# Altium PCB PCB1.PcbDoc
Units mm, origin at the board's own origin, x right, y up, seen from the top; angles counter-clockwise.
Board outline 64 x 100 mm, 2 copper layers (Top Layer, Bottom Layer); 37 components, 46 nets, 202 pads, 46 vias.
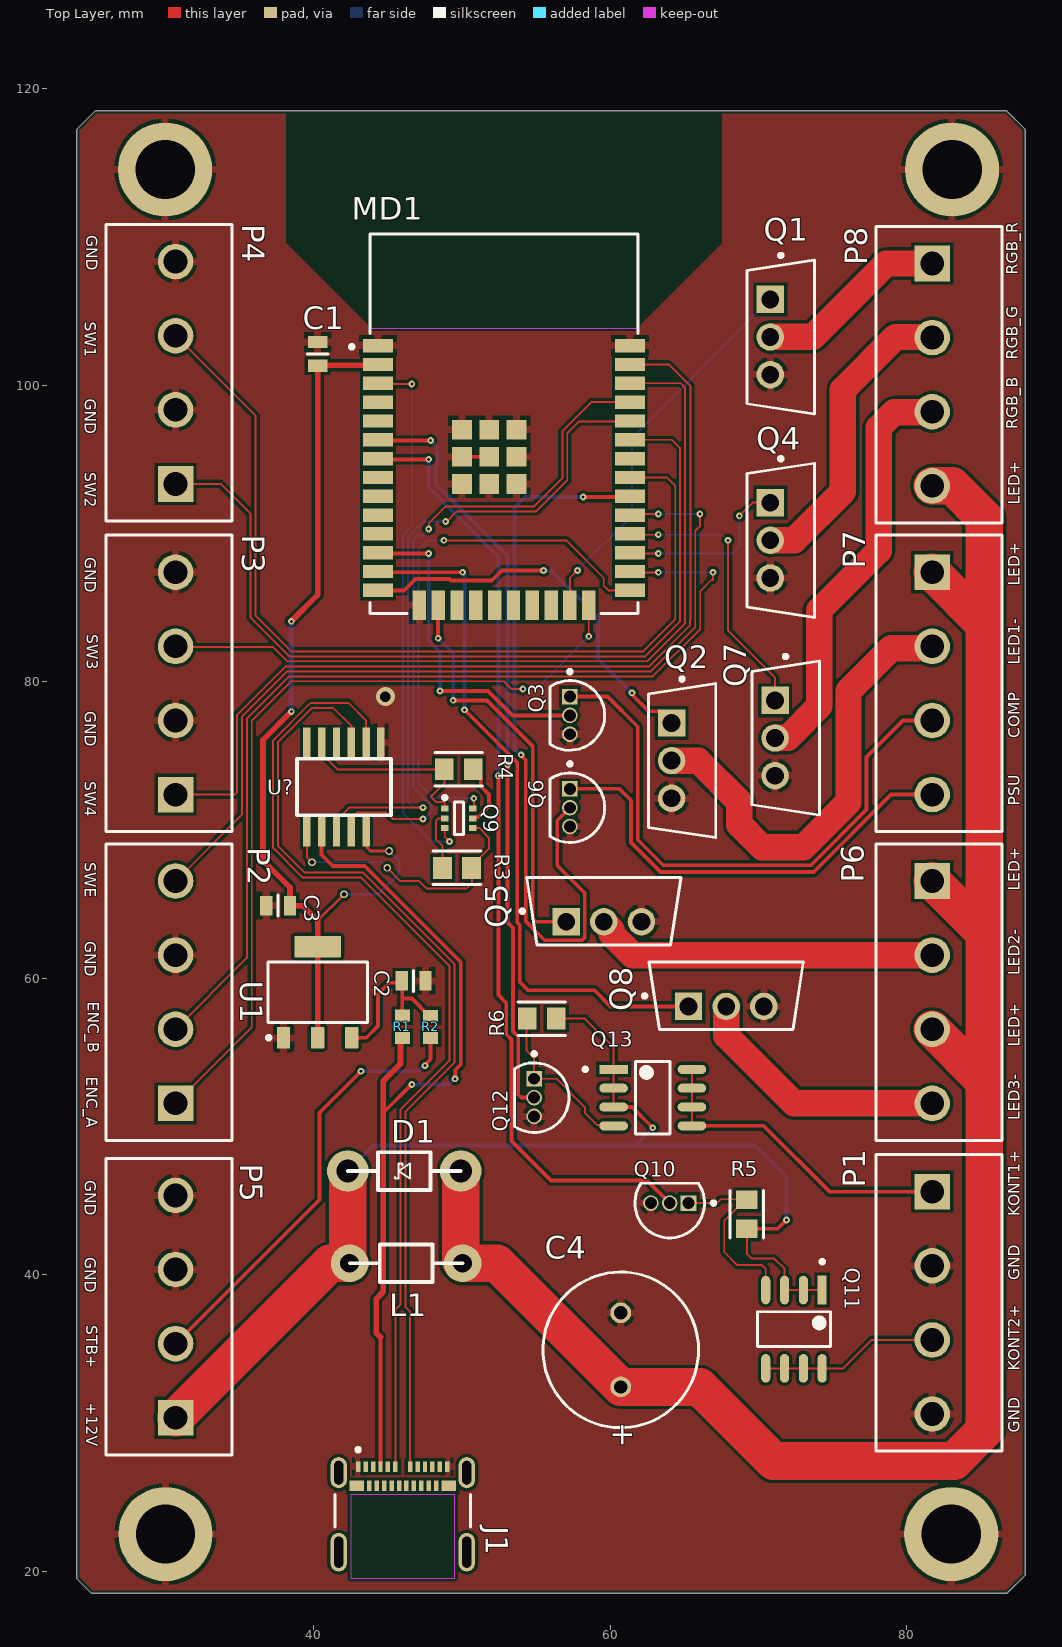
[diagram p0: Top Layer view]
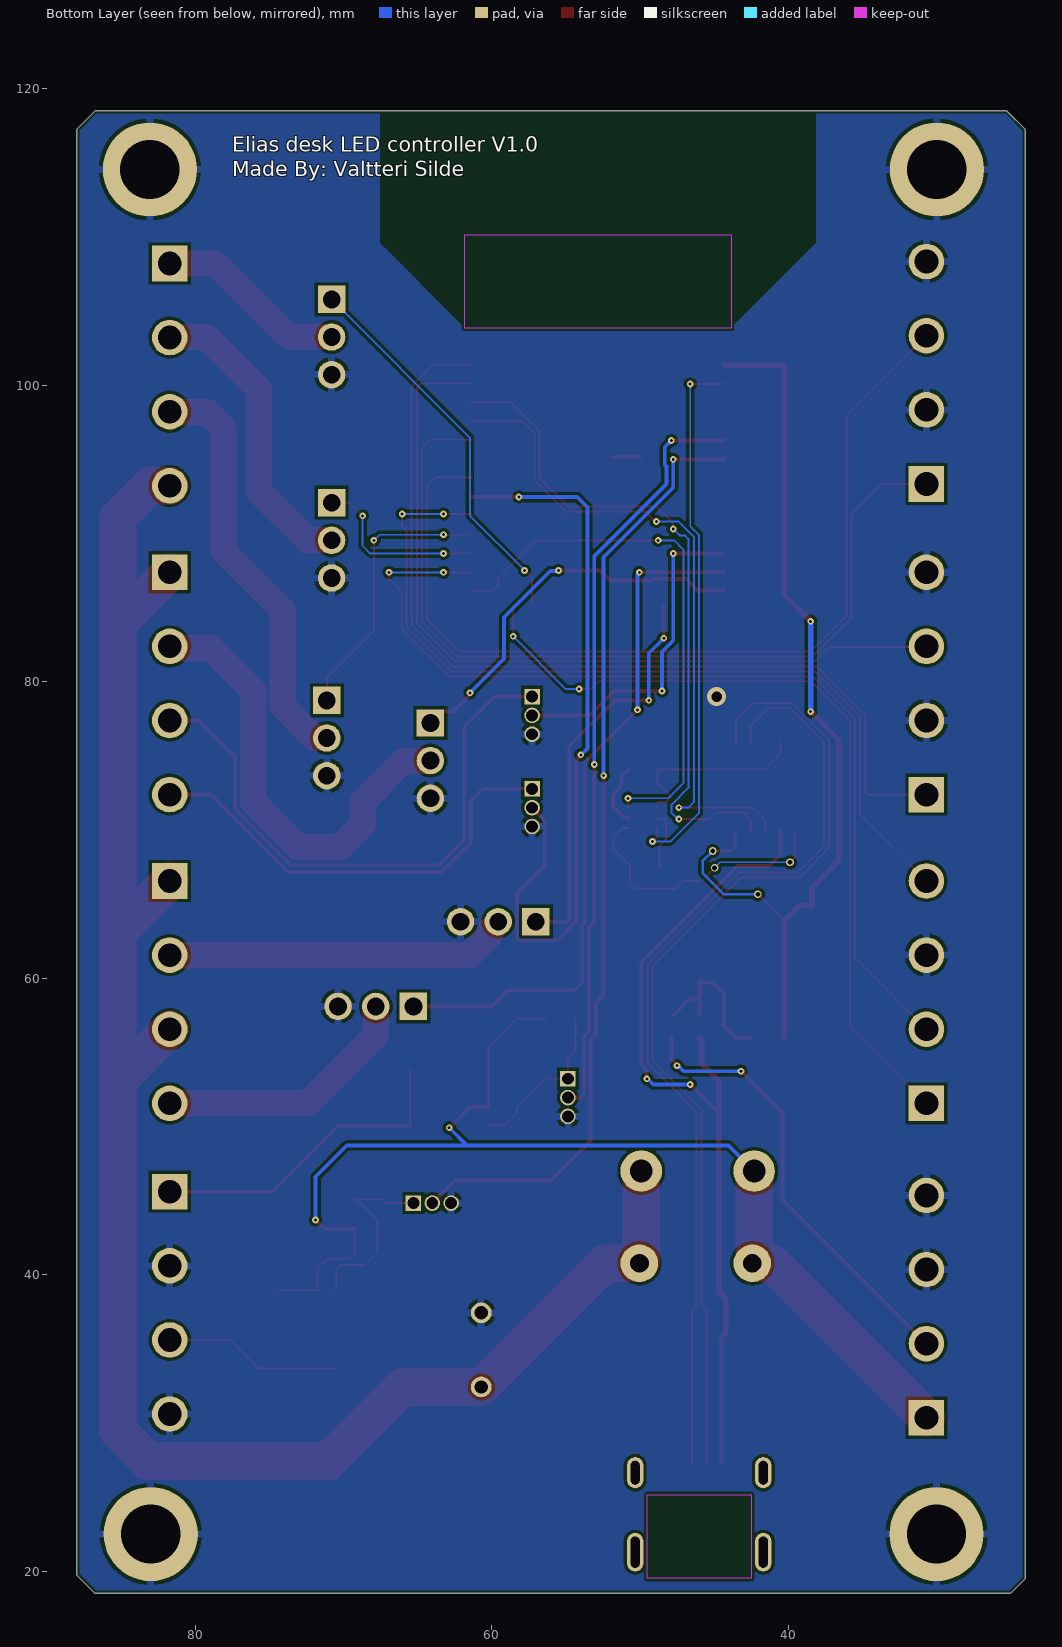
[diagram p1: Bottom Layer view, seen from below]
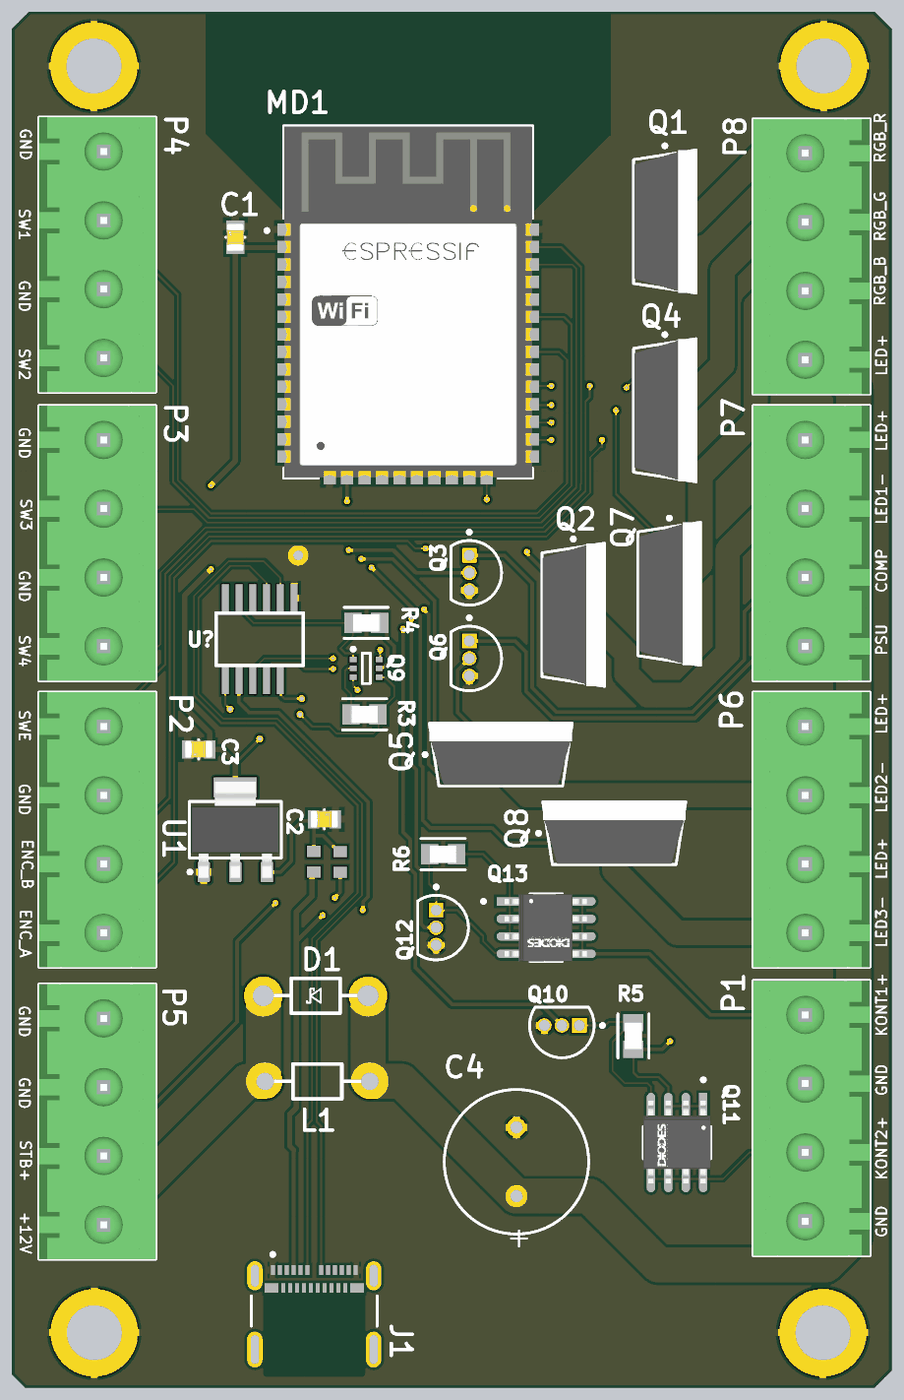
[diagram p2: 3D render of the assembled board from above, using the file's embedded part models]

## Layer stack, top to bottom
Top Solder: solder mask 0.0102, Solder Resist, Dk 3.5
Top Layer: signal copper 0.0356
Dielectric 1: dielectric 0.32, FR-4, Dk 4.8
Bottom Layer: signal copper 0.0356
Bottom Solder: solder mask 0.0102, Solder Resist, Dk 3.5

## Board outline
25.25,118.5 24,117.25 24,19.5 25,18.5 86.75,18.5 88,19.75 88,117.25 86.75,118.5

## Design rules (kind name [scope] priority, off if disabled: settings)
BoardOutlineClearance [All] p1: gap=0.2 ignorepadtopadclearanceinfootprint=FALSE except(0.4: Arc-SplitBarrior Arc-SplitContinuation Track-SplitBarrior Track-SplitContinuation SMDPad-SplitBarrior SMDPad-SplitContinuation THPad-SplitBarrior THPad-SplitContinuation Via-SplitBarrior Via-SplitContinuation Fill-SplitBarrior Fill-SplitContinuation Poly-SplitBarrior Poly-SplitContinuation Region-SplitBarrior Region-SplitContinuation Text-SplitBarrior Text-SplitContinuation)
Clearance "Clearance Bottom Layer" [OnLayer('Bottom Layer')] p1: gap=0.203 ignorepadtopadclearanceinfootprint=TRUE except(0.254: Arc-Text Track-Text SMDPad-Text THPad-Text Via-Text Fill-Text Poly-Text Region-Text Text-Text)
Clearance "Clearance Top Layer" [OnLayer('Top Layer')] p2: gap=0.203 ignorepadtopadclearanceinfootprint=TRUE except(0.254: Arc-Text Track-Text SMDPad-Text THPad-Text Via-Text Fill-Text Poly-Text Region-Text Text-Text)
Clearance [All] p3: gap=0.2 ignorepadtopadclearanceinfootprint=FALSE except(0.089: Arc-Arc Arc-Track Arc-SMDPad Track-Track Track-SMDPad SMDPad-SMDPad; 0.127: Arc-Via Track-Via SMDPad-Via THPad-Via Via-Via; 0.254: Arc-Text Track-Text SMDPad-Text THPad-Text Via-Text Fill-Text Poly-Text Region-Text Text-Text)
HoleSize [All] p1: absolutevalues=TRUE maxlimit=6.3 minlimit=0.2 maxpercent=80.000 minpercent=20.000
MinimumAnnularRing [All] p1: minimumring=0.076
MinimumSolderMaskSliver [All] p1: minsoldermaskwidth=0.1
PolygonConnect PolygonConnect_1 [All] p1: thpad.connectstyle=Relief thpad.reliefconductorwidth=0.508 thpad.reliefentries=4 thpad.polygonreliefangle="90 Angle" thpad.airgapwidth=0.254 smdpad.connectstyle=Relief smdpad.reliefconductorwidth=0.508 smdpad.reliefentries=4 smdpad.polygonreliefangle="90 Angle" smdpad.airgapwidth=0.254 via.connectstyle=Direct via.reliefconductorwidth=0.508 via.reliefentries=4 via.polygonreliefangle="90 Angle" via.airgapwidth=0.254
RoomDefinition Sheet1 [InComponentClass('Sheet1')] p1: confinementstyle=ConfineIn formatcopy=TRUE lockcomponents=FALSE outline 104.521,66.294 121.539,66.294 121.539,77.216 104.521,77.216
RoutingCorners [All] p1: cornerstyle=Round minsetback=2.54 maxsetback=2.54
RoutingVias [All] p1: holewidth=0.5 width=1 viastyle="Through Hole" minholewidth=0.2 minwidth=0.45 maxholewidth=1 maxwidth=2
SilkToSilkClearance [All] p1: silktosilkclearance=0.1
SilkToSolderMaskClearance [IsPad] p1: minsilkscreentomaskgap=0.1 clearancetoexposedcopper=TRUE
SolderMaskExpansion [All] p1: expansion=0.102 istentingtop=FALSE
Width [All] p1: maxlimit=2.54 minlimit=0.089 preferedwidth=0.381
25 further rules are at their usual default settings.

## Components (designator, comment, footprint, x,y, rotation, side; value= is the part's Value field where it differs from the comment)
C1 "CL21B106KOQNNNG" FP-CL21B106KOQNNNG-MFG 40.259,102.108 r90 top value=10uF
C2 "CL21B106KOQNNNG" FP-CL21B106KOQNNNG-MFG 46.736,59.817 r0 top value=10uF
C3 "CL21B106KOQNNNG" FP-CL21B106KOQNNNG-MFG 37.592,64.897 r180 top value=22uF
C4 "ECA-1HHG471" PNSC-CAP-10x20-P2 60.706,34.925 r90 top
D1 "15SQ045" "Shottky Diode" 46.101,46.99 r180 top
J1 "1054500101" FP-1054500101-MFG 46,23.28 r0 top
L1 "77 A-3 R 9 M-00" "FIlter Inductor" 46.228,40.767 r0 top
MD1 "ESP32-WROOM-32D" FP-ESP32-WROOM-32D-MFG 52.832,97.409 r0 top
P1 "691311700004" 691311700004 82.169,38.1 r270 top
P2 "691311700004" 691311700004 30.226,59.055 r90 top
P3 "691311700004" 691311700004 30.226,79.883 r90 top
P4 "691311700004" 691311700004 30.226,100.838 r90 top
P5 "691311700004" 691311700004 30.226,37.846 r90 top
P6 "691311700004" 691311700004 82.169,59.055 r270 top
P7 "691311700004" 691311700004 82.169,79.883 r270 top
P8 "691311700004" 691311700004 82.169,100.711 r270 top
Q1 "IRLZ44NPbF" FP-PG-TO220-3-MFG 71.501,103.251 r0 top
Q2 "IRLZ44NPbF" FP-PG-TO220-3-MFG 64.84,74.676 r0 top
Q3 "BS170" ONSC-TO-92-3-29-11 57.277,77.724 r270 top
Q4 "IRLZ44NPbF" FP-PG-TO220-3-MFG 71.501,89.535 r0 top
Q5 "IRLZ44NPbF" FP-PG-TO220-3-MFG 59.563,64.516 r90 top
Q6 "BS170" ONSC-TO-92-3-29-11 57.277,71.501 r270 top
Q7 "IRLZ44NPbF" FP-PG-TO220-3-MFG 71.825,76.2 r0 top
Q8 "IRLZ44NPbF" FP-PG-TO220-3-MFG 67.818,58.801 r90 top
Q9 "BC846BDW1T1G" ONSC-SOT-363-6-419B-02_W_V 49.784,70.782 r0 top
Q10 "BS170" ONSC-TO-92-3-29-11 64.008,44.831 r180 top
Q11 "EY4409" FP-SO-8-IPC_A 72.39,36.322 r270 top
Q12 "BS170" ONSC-TO-92-3-29-11 54.864,51.943 r270 top
Q13 "EY4409" FP-SO-8-IPC_A 62.865,51.943 r0 top
R1 "RC0603JR-070RL" RESC1608X55X25ML10T15 45.974,56.726 r90 top
R2 "RC0603JR-070RL" RESC1608X55X25ML10T15 47.879,56.714 r90 top
R3 "CR0805-FX-1002ELF" FP-CR0805-IPC_A 49.657,67.437 r180 top
R4 "CR0805-FX-1002ELF" FP-CR0805-IPC_A 49.784,74.084 r180 top
R5 "CR0805-FX-1002ELF" FP-CR0805-IPC_A 69.215,44.069 r270 top
R6 "CR0805-FX-1002ELF" FP-CR0805-IPC_A 55.372,57.277 r0 top
U1 "CJT1117B-3.3" DCY0004A_L 40.259,59.055 r90 top
U? "CH340K USB to UART bridge IC" "CH340K footprint" 41.529,72.898 r270 top

## Footprints (in the part's own frame and the unit in brackets; to place one, negate y for a bottom-side part, rotate by r counter-clockwise, add the part's x,y. Pads: shape width x height; smd on the part's side, far side on the other; paste and mask are expansions set on the pad)
691311700004 [mm] "5.00mm - Open Vertical PCB Header - 04p"
  rect 2.4x2.4 hole 1.6: 1(-7.5,-0.45)
  round 2.4 hole 1.6: 2(-2.5,-0.45) 3(2.5,-0.45) 4(7.5,-0.45)
  silkscreen extent -10,-4.25 10,4.25, body extent -10,-4.25 10,4.25, height 12.1
"CH340K footprint" [mm]
  rect 2x0.5 smd: 0(-3,3) 1(-3,2) 2(-3,1) 3(-3,0) 4(-3,-1) 5(-3,-2) 6(3,-2) 7(3,-1) 8(3,0) 9(3,1) 10(3,2)
  silkscreen extent -1.91,-2.67 1.91,3.68
DCY0004A_L [mm] "SOT223, 4-Leads, Body 6.7x3.7mm, Pitch 2.3mm, IPC High Density"
  rrect11% 1.45x0.9 smd: 1(-3.075,2.3) 2(-3.075,0) 3(-3.075,-2.3)
  rrect7% 1.45x3.15 smd: 4(3.075,0)
  silkscreen extent -3.2,-3.35 2.05,3.42, body extent -3.5,-3.25 3.5,3.25, height 1.62
"FIlter Inductor" [mm] "Fastron  77 A-3 R 9 M-00"
  round 2.54 hole 1.27: 1(-3.81,0) 2(3.81,0)
  silkscreen extent -3.81,-1.27 3.81,1.27
FP-1054500101-MFG [mm]
  rrect100% 1.1x2.1 hole 1.6 slot 0.6 at 0 deg paste-1000 mask+0: 1(-4.32,3.36) 2(4.32,3.36)
  rrect100% 1.1x2.6 hole 2.1 slot 0.6 at 0 deg paste-1000 mask+0: 3(-4.32,-2) 4(4.32,-2)
  rect 0.3x0.7 smd paste+0 mask+0: A1(-3,3.77) A2(-2.5,3.77) A3(-2,3.77) A4(-1.5,3.77) A5(-1,3.77) A6(-0.5,3.77) A7(0.5,3.77) A8(1,3.77) A9(1.5,3.77) A10(2,3.77) A11(2.5,3.77) A12(3,3.77) B2(2.25,2.47) B3(1.75,2.47) B4(1.25,2.47) B5(0.75,2.47) B6(0.25,2.47) B7(-0.25,2.47) B8(-0.75,2.47) B9(-1.25,2.47) B10(-1.75,2.47) B11(-2.25,2.47)
  rect 1x0.7 smd paste+0 mask+0: B1(3.1,2.47) B12(-3.1,2.47)
  Keep-Out Layer region: -3.5,-3.77 3.5,-3.77 3.5,1.88 -3.5,1.88
  silkscreen extent -4.57,-0.3 4.57,5.03
FP-CL21B106KOQNNNG-MFG [mm]
  rect 0.825x1.325 smd paste+0 mask+0: 1(-0.8,0) 2(0.8,0)
  silkscreen extent 0,-0.7 0,0.7, body extent -1.31,-0.8 1.31,0.8, height 0.25
FP-CR0805-IPC_A [mm]
  rect 1.258x1.462 smd paste+0 mask+0: 1(-0.977,0) 2(0.977,0)
  silkscreen extent -1.61,-1.13 1.61,1.13, body extent -2.11,-1.23 2.11,1.23, height 0.25
FP-ESP32-WROOM-32D-MFG [mm]
  rect 2x0.9 smd paste+0 mask+0: 1(-8.5,5.26) 2(-8.5,3.99) 3(-8.5,2.72) 4(-8.5,1.45) 5(-8.5,0.18) 6(-8.5,-1.09) 7(-8.5,-2.36) 8(-8.5,-3.63) 9(-8.5,-4.9) 10(-8.5,-6.17) 11(-8.5,-7.44) 12(-8.5,-8.71) 13(-8.5,-9.98) 14(-8.5,-11.25) 25(8.5,-11.25) 26(8.5,-9.98) 27(8.5,-8.71) 28(8.5,-7.44) 29(8.5,-6.17) 30(8.5,-4.9) 31(8.5,-3.63) 32(8.5,-2.36) 33(8.5,-1.09) 34(8.5,0.18) 35(8.5,1.45) 36(8.5,2.72) 37(8.5,3.99) 38(8.5,5.26)
  rect 0.9x2 smd paste+0 mask+0: 15(-5.715,-12.25) 16(-4.445,-12.25) 17(-3.175,-12.25) 18(-1.905,-12.25) 19(-0.635,-12.25) 20(0.635,-12.25) 21(1.905,-12.25) 22(3.175,-12.25) 23(4.445,-12.25) 24(5.715,-12.25)
  rect 1.33x1.33 smd paste+0 mask+0: 39(-2.835,-4.075) 39(-2.835,-2.24) 39(-2.835,-0.405) 39(-1,-4.075) 39(-1,-2.24) 39(-1,-0.405) 39(0.835,-4.075) 39(0.835,-2.24) 39(0.835,-0.405)
  Keep-Out Layer region: -9,6.45 9,6.45 9,12.75 -9,12.75
  Keep-Out Layer region: -9,6.45 9,6.45 9,12.75 -9,12.75
  silkscreen extent -10.4,-12.8 9.05,12.8, body extent -9.6,-13.35 9.6,12.9, height 0.25
FP-PG-TO220-3-MFG [mm]
  rect 1.85x1.85 hole 1.2 paste-1000 mask+0: 1(-0.705,2.54)
  round 1.85 hole 1.2 paste-1000 mask+0: 2(-0.705,0) 3(-0.705,-2.54)
  silkscreen extent -2.27,-5.2 2.27,5.62, body extent -2.37,-5.55 2.37,5.55, height 0.25
FP-SO-8-IPC_A [mm]
  rect 1.93x0.612 smd paste+0 mask+0: 1(-2.641,1.905)
  rrect100% 1.93x0.612 smd paste+0 mask+0: 2(-2.641,0.635) 3(-2.641,-0.635) 4(-2.641,-1.905) 5(2.641,-1.905) 6(2.641,-0.635) 7(2.641,0.635) 8(2.641,1.905)
  silkscreen extent -4.68,-2.45 1.18,2.45, body extent -4.11,-2.95 4.11,2.95, height 0.25
ONSC-SOT-363-6-419B-02_W_V [mm] "SOT23, 6-Leads, Body 2x1.25mm, Pitch 0.65mm"
  rect 0.5x0.4 smd: 1(-0.95,0.65) 2(-0.95,0) 3(-0.95,-0.65) 4(0.95,-0.65) 5(0.95,0) 6(0.95,0.65)
  silkscreen extent -1.07,-1.1 0.3,1.52, body extent -0.63,-1 0.63,1, height 1.1
ONSC-TO-92-3-29-11 [mm] "TO, 3-Leads, Body Dia 4.7mm, Pitch 1.27mm"
  rect 1.05x1.05 hole 0.8: 1(-1.27,0)
  round 1.05 hole 0.8: 2(0,0) 3(1.27,0)
  silkscreen extent -3.07,-1.34 2.35,2.35, body extent -2.35,-1.33 2.36,2.36, height 7.87
PNSC-CAP-10x20-P2 [mm] "THD, 2-Leads, Dia 10.5mm, Body Length 22mm, Pin Spacing 5mm"
  round 1.4 hole 0.9: 1(-2.5,0) 2(2.5,0)
  silkscreen extent -5.25,-5.25 5.25,5.25, body extent -5.25,-5.25 5.25,5.25, height 22
RESC1608X55X25ML10T15 [mm] "Chip Resistor, 2-Leads, Body 1.60x0.80mm, IPC Low Density"
  rect 0.8x1 smd: 1(-0.75,0) 2(0.75,0)
  body extent -0.85,-0.45 0.85,0.45, height 0.55
"Shottky Diode" [mil] "Diotec 15SQ045"
  round 110 hole 60: 1(-150,0) 2(150,0)
  silkscreen extent -150,-50 150,50

## Part data
C1: library part CMP-13271-000015-1, "CAP CER 10UF 16V X7R 0805", Capacitance=100nF, Manufacturer="Samsung Electro-Mechanics", Package=0, Temperature="-55°C to +125°C", Temperature Characteristic=X7R, Temperature Coefficient=15%, Temperature Range High=+125°C, Temperature Range Low=-55°C, Tolerance=10%, Voltage Rating=16V, Automotive=No, Category=Cap, ComponentLink2Description=Datasheet, ComponentLink2URL=http://product.samsungsem.com/mlcc/CL21B106KOQNNN.do, Device Class L1="Passive Components", Device Class L2=Capacitors, Device Class L3="Ceramic Capacitors", Digikey Description="CAP CER 10UF 16V X7R 0805", Height=1.4mm, Ipc Land Pattern Name=CAPC200125X125, Lead Free=Yes, Manufacturer Part Number=CL21B106KOQNNNG, Material=Ceramic, Octopart=https://octopart.com/cl21b106koqnnng-samsung-19995691, RoHS=TRUE
C2: library part CMP-13271-000015-1, "CAP CER 10UF 16V X7R 0805", Capacitance=10uF, Manufacturer="Samsung Electro-Mechanics", Package=0, Temperature="-55°C to +125°C", Temperature Characteristic=X7R, Temperature Coefficient=15%, Temperature Range High=+125°C, Temperature Range Low=-55°C, Tolerance=10%, Voltage Rating=16V, Automotive=No, Category=Cap, ComponentLink2Description=Datasheet, ComponentLink2URL=http://product.samsungsem.com/mlcc/CL21B106KOQNNN.do, Device Class L1="Passive Components", Device Class L2=Capacitors, Device Class L3="Ceramic Capacitors", Digikey Description="CAP CER 10UF 16V X7R 0805", Height=1.4mm, Ipc Land Pattern Name=CAPC200125X125, Lead Free=Yes, Manufacturer Part Number=CL21B106KOQNNNG, Material=Ceramic, Octopart=https://octopart.com/cl21b106koqnnng-samsung-19995691, RoHS=TRUE
C3: library part CMP-13271-000015-1, "CAP CER 10UF 16V X7R 0805", Capacitance=22uF, Manufacturer="Samsung Electro-Mechanics", Package=0, Temperature="-55°C to +125°C", Temperature Characteristic=X7R, Temperature Coefficient=15%, Temperature Range High=+125°C, Temperature Range Low=-55°C, Tolerance=10%, Voltage Rating=16V, Automotive=No, Category=Cap, ComponentLink2Description=Datasheet, ComponentLink2URL=http://product.samsungsem.com/mlcc/CL21B106KOQNNN.do, Device Class L1="Passive Components", Device Class L2=Capacitors, Device Class L3="Ceramic Capacitors", Digikey Description="CAP CER 10UF 16V X7R 0805", Height=1.4mm, Ipc Land Pattern Name=CAPC200125X125, Lead Free=Yes, Manufacturer Part Number=CL21B106KOQNNNG, Material=Ceramic, Octopart=https://octopart.com/cl21b106koqnnng-samsung-19995691, RoHS=TRUE
C4: library part CMP-2000-05308-1, "Aluminum Electrolytic Capacitor, 470 uF, +/- 20%, 50 V, -55 to 105 degC, 2-Pin THD, RoHS, Bulk", Capacitance=470µF, Case Size/Dimension=Ø10x20mm, Lifetime@Temperature=2000Hrs@105degC, Manufacturer=Panasonic, Operating Temp Range=-55to+105degC, Operating Temp-Max=105degC, Package Description="2-Pin Through Hole Device, Dia 10 mm, Body Length 20 mm, Pin Spacing 5 mm", Package Reference=CAP-10x20-P2, Package Version=Nov-12, Rated Voltage=50V, Ripple Current=530mA, Datasheet URL=http://www.alliedelec.com/images/products/datasheets/bm/Panasonic/70067776.pdf, Datasheet Version=Nov-12, Manufacturer URL=http://www.panasonic.com/, Package URL=http://www.alliedelec.com/images/products/datasheets/bm/Panasonic/70067776.pdf, Series=NHG, Type=Radial
D1: "Diotec 15SQ045", Current=15A, Voltage=45V
J1: library part CMP-04767-000004-1, "CONN RCP USB3.1 TYPEC 24P SMD RA", Current Rating=0.25/1.25/5A, Manufacturer=Molex, Package=0, Temperature="-30°C to +85°C", Temperature Range High=+85°C, Temperature Range Low=-30°C, Voltage Rating=30V, Automotive=No, Category=Conn, ComponentLink2Description=Datasheet, ComponentLink2URL=https://www.molex.com/webdocs/datasheets/pdf/en-us/1054500101_IO_CONNECTORS.pdf, Conn Orientation="Right Angle", Contact Material=Gold,Nickel, Device Class L1=Connectors, Device Class L2="USB Connectors", Device Class L3=unset, Digikey Description="CONN RCP USB3.1 TYPEC 24P SMD RA", Footprint Url=https://www.molex.com/pdm_docs/sd/1054500101_sd.pdf, Height=3.44mm, Is Female=yes, Lead Free=Yes, Manufacturer Part Number=1054500101, Mouser Description="USB Shielded I/O Receptacle; Type C; Right Angle; Surface Mount; Gold over Nickel", Number Of Contacts=24, Octopart=https://octopart.com/105450-0101-molex-68082325, Pitch=0.5mm, RoHS=TRUE, Shielding=true, Usb Standard="USB 3.1"
L1: "Fastron 77 A-3 R 9 M-00", Inductance=3.9uH, Max Current=12A, Tolerance=+-20%
MD1: library part CMP-194065-000003-1, "WIFI MODULE 32MBITS SPI FLASH", Manufacturer="Espressif Systems", Max Frequency=2484MHz, Max Supply Voltage=3.6V, Min Supply Voltage=3V, Nominal Supply Current=500mA, Temperature="-40°C to +85°C", Temperature Range High=+85°C, Temperature Range Low=-40°C, Automotive=No, Bandwidth=72MHz, Category=UNK, ComponentLink2Description=Datasheet, ComponentLink2URL=https://www.espressif.com/sites/default/files/documentation/esp32-wroom-32d_esp32-wroom-32u_datasheet_en.pdf, Data Rate=150Mbits/s, Device Class L1="Integrated Circuits (ICs)", Device Class L2="RF Semiconductors and Devices", Device Class L3=Transceivers, Digikey Description="WIFI MODULE 32MBITS SPI FLASH", Height=3.2mm, Interface=I2C,SPI,UART,Ethernet,I2S,Other, Lead Free=Yes, Manufacturer Part Number=ESP32-WROOM-32D, Mouser Description="Wi-Fi/BT BLE Module ESP32-D0WD, SPI Flash, UART, P", Number Of Adc Channels=16, Number Of Gpio=32, Octopart=https://octopart.com/esp32-wroom-32d-espressif+systems-91040050, Package=ESP32-WROOM-32D, RoHS=TRUE, Sensitivity=-98dBm
P1 P2 P3 P4 P5 P6 P7 P8: library part CMP-1502-02028-1, "Serie 3117 - 5.00mm Open Vertical PCB Header WR-TBL, 4 pin, LCSC: DB128V-5.08-4P-GN-S", Manufacturer="Wurth Elektronik", Operating Temperature=-40to105degC, Datasheet URL=http://katalog.we-online.de/em/datasheet/6913117000xx.pdf, Gender=Male, Manufacturer URL=http://www.we-online.de, Mounting Technology=THT, Package Reference=691311700004, Packaging=Box, Part Number=691311700004, Pin Number=4, Pitch=5.00mm, Publisher=WurthElektronik
Q1 Q2 Q4 Q5 Q7 Q8: library part CMP-32901-000488-1, "MOSFET N-CH 55V 47A TO220AB", Case/Package=TO-220, Continuous Drain Current (ID)=47A, Drain to Source Breakdown Voltage=55V, Drain to Source Resistance=35mR, Gate to Source Voltage (Vgs)=16V, Input Capacitance=1.7nF, Max Operating Temperature=175°C, Max Power Dissipation=110W, Min Operating Temperature=-55°C, Threshold Voltage=2V, Drain to Source Voltage (Vdss)=55V, Element Configuration=Single, Halogen Free="Halogen Free", Height=0.6inch, Lead Free="Lead Free", Length=0.414inch, Max Dual Supply Voltage=55V, Mount="Through Hole", Number of Pins=3, Packaging=Rail/Tube, Power Dissipation=110W, Rds On Max=22mR, REACH SVHC="No SVHC", RoHS Compliant=Yes, Turn-Off Delay Time=26ns, Turn-On Delay Time=11ns, Width=0.185inch
Q3 Q6 Q10 Q12: library part CMP-1058-00929-1, "Small Signal MOSFET, 500 mA, 60 V, N-Channel, 3-Pin TO-92, Bulk Box", Manufacturer="On Semiconductor", Package Type=TO-92, Channel Polarity="N Channel", ComponentLink1Description="Manufacturer URL", ComponentLink1URL=http://www.onsemi.com/, ComponentLink2Description=Datasheet, ComponentLink2URL=http://www.onsemi.com/pub_link/Collateral/BS170-D.PDF, ComponentLink3Description="Package Specification", ComponentLink3URL=http://www.onsemi.cn/pub_link/Collateral/2N6426-D.PDF, Configuration=Single, DatasheetVersion="Rev. 6", ID Max (A)=0.5, Mounting Technology="Through Hole", PackageDescription="3-Pin Transistor Outline, Body 4.825 x 3.685 mm, Pitch 1.27 mm", PackageReference=TO-92-3-29-11_AM_SL, PackageVersion="Rev. AM", Packing="Bulk Box", PartNumber=BS170, PD Max (W)=0.35, V(BR)DSS Min (V)=60, VGS Max (V)=20, VGS(th) Max (V)=3
Q9: library part CMP-1048-00850-1, "Dual General Purpose Transistors, NPN, 6-Pin SOT-363, Pb-Free, Tape and Reel", Manufacturer="On Semiconductor", ComponentLink1Description="Manufacturer URL", ComponentLink1URL=http://www.onsemi.com/, ComponentLink2Description=Datasheet, ComponentLink2URL=http://www.onsemi.cn/pub_link/Collateral/BC846BDW1T1-D.PDF, ComponentLink3Description="Package Specification", ComponentLink3URL=http://www.onsemi.com/pub_link/Collateral/NTJD4001N-D.PDF, DatasheetVersion="Rev. 9", fT Min (MHz)=100, IC Continuous (A)=0.1, Mounting Technology="Surface Mount", PackageDescription="6-Pin Small Outline Transistor, Body 2 x 1.25 mm, Pitch 0.65 mm", PackageReference=SOT-363-6-419B-02_W, PackageVersion="Rev. W, 01/2006", Packing="Tape and Reel", PartNumber=BC846BDW1T1G, Polarity="Dual NPN", RoHS=TRUE
Q11 Q13: library part CMP-12801-000090-1, "MOSFET P-CH 30V 14A 8SOIC", Case/Package=SOP, Continuous Drain Current (ID)=10A, Drain to Source Resistance=8mR, Drain to Source Voltage (Vdss)=-20V, Gate to Source Voltage (Vgs)=12V, Input Capacitance=2.444nF, Max Operating Temperature=150°C, Max Power Dissipation=2.5W, Min Operating Temperature=-55°C, Package Quantity=2500, Threshold Voltage=770mV, Contact Plating=Tin, Element Configuration=Single, Fall Time=76.5ns, Height=1.5mm, Length=5.3mm, Mount="Surface Mount", Number of Channels=1, Number of Elements=1, Number of Pins=8, Packaging="Tape and Reel", Power Dissipation=2.5W, Radiation Hardening=No, Rds On Max=13mR, REACH SVHC="No SVHC", Rise Time=9.9ns, Turn-Off Delay Time=108ns, Turn-On Delay Time=7.5ns, Weight=0.030018oz, Width=4.1mm
R1 R2: library part CMP-2100-03667-1, "Chip Resistor, 0 Ohm, +/- 5%, 0.1 W, -55 to 155 degC, 0603 (1608 Metric), RoHS, Tape and Reel", Case Code (Imperial)=0603, Case Code (Metric)=1608, Manufacturer=Yageo, Max Operating Temperature=155degC, Min Operating Temperature=-55degC, Package Description="2-Pin Surface Mount Device, Body 1.6 x 0.8 mm", Package Quantity=5000, Power Rating=100mW, Resistance=0mOhm, Temperature Coefficient=200ppm/degreesC, Tolerance=5%, Voltage Rating=50V, Case/Package=0603, Composition=ThickFilm, Contact Plating=Tin, Datasheet URL=http://www.yageo.com/NewPortal/yageodocoutput?fileName=/pdf/R-Chip/PYu-RC_Group_51_RoHS_L_5.pdf, Datasheet Version="Rev. 5, 10/2016", Depth=0.8mm, Height=0.45mm, Lead Free=LeadFree, Length=1.6mm, Manufacturer URL=http://www.yageo.com/, Military Standard=Not, Number of Pins=2, Package Reference=0603, Packaging=TapeandReel, Radiation Hardening=No, REACH SVHC=NoSVHC, RoHSCompliant=true, Termination=SMD/SMT, Voltage Rating (DC)=50V, Width=0.8mm
R3 R4 R5 R6: library part CMP-07231-003204-1, "Thick Film Chip Resistors 0805 10kΩ 0.125W 1% 100ppm/°C", Case Code (Imperial)=0805, Case Code (Metric)=2012, Max Operating Temperature=155°C, Max Power Dissipation=125mW, Min Operating Temperature=-55°C, Package Quantity=1, Resistance=10kR, Temperature Coefficient=100ppm/°C, Tolerance=1%, Voltage Rating=150V, Voltage Rating (DC)=100V, Case/Package=0805, Composition="Thick Film", Contact Plating=Tin, Depth=1.25mm, Features="Moisture Resistant", Height=0.5mm, Length=2mm, Mount="Surface Mount", Number of Terminations=2, Packaging="Tape and Reel", Power Rating=125mW, Radiation Hardening=No, REACH SVHC="No SVHC", Termination=SMD/SMT, Thickness=508um, Width=1.25mm
U1: library part CMP-0395-00527-2, "75dB@(120Hz) 1A 1.3V@(1A) Fixed 3.3V~3.3V Positive 1 15V SOT-223 Linear Voltage Regulators (LDO) ROHS", Rating=Catalog, Code_JEDEC=TO-261, ComponentLink1Description="Manufacturer URL", ComponentLink1URL=http://www.ti.com/, ComponentLink2Description=Datasheet, ComponentLink2URL=https://datasheet.lcsc.com/lcsc/2108131530_Jiangsu-Changjing-Electronics-Technology-Co---Ltd--CJT1117B-3-3_C78777.pdf, ComponentLink3Description="Package Specification", ComponentLink3URL=http://www.ti.com/litv/pdf/mpds094a, DatasheetVersion=SBVS001D, Eco-Plan="Green (RoHS & no Sb/Br)", Fixed Output Options(V)=3.3, Iout(Max)(A)=0.8, Iq(Typ)(mA)=4, Mounting Technology="Surface Mount", PackageDescription="4-Pin Plastic Small Outline, Body 3.5 x 6.5 mm, Pitch 2.3 mm", PackageReference=DCY0004A, PackageVersion=4202506/B, PartNumber=CJT1117B-3.3, SubFamily="Single Channel LDO", Vdo(Typ)(mV)=1100, Vin(Max)(V)=15, Vin(Min)(V)=3.8, Vout Adj(Max)(V)=2.8, Vout Adj(Min)(V)=2.8
U?: library part CH340K

## Free pads (board coordinates)
  round 6.35 hole 4: 2(29.972,114.554) 3(83.058,114.554) 4(30,22.5) 5(83,22.5)

## Via types
v1: diameter 0.45, hole 0.2, Top Layer to Bottom Layer, 41 vias
v2: diameter 0.508, hole 0.33, Top Layer to Bottom Layer, 4 vias
v3: diameter 1.27, hole 0.711, Top Layer to Bottom Layer, 1 vias

## Nets (pads, with @x,y where several pads share a name; then routed paths per layer and width w, separated by ;. In a path a pad name is that pad's centre, name@x,y a point inside that pad or via, vN(x,y) a via of type N, cw(c..) or ccw(c..) an arc to the next point about the centre after c; other vN are vias at no path point)
+3V3: C1.1 C3.1 MD1.2 U1.2 U1.4 U?.10 | length 64.3
  Top Layer w0.178: 40.259,63.881 v2(42.037,65.659) ; U?.10 43.561,69.866 43.561,68.834 43.815,68.58 v2(45.085,68.58)
  Top Layer w0.381: v1(38.481,77.978) 36.576,76.073 36.576,67.945 38.392,66.129 C3.1 39.243,64.897 40.259,63.881 U1.4 U1.2 ; v1(38.481,84.074) 40.259,85.852 C1.1 40.304,101.353 44.286,101.353 MD1.2
  Bottom Layer w0.178: v2(42.037,65.659) 44.323,65.659 45.773,67.109 45.773,67.892 v2(45.085,68.58)
  Bottom Layer w0.381: v1(38.481,77.978) v1(38.481,84.074)
+12: D1.2 L1.1 P5.1 Q11.1 Q11.2 Q11.3 Q13.1 Q13.2 Q13.3 R5.2 R6.2 | length 81.6
  Top Layer w0.127: R6.2 58.293,57.277 60.224,55.346 Q13.1 Q13.2 Q13.3 ; R5.2 69.215,41.402 69.539,41.078 71.063,41.078 71.755,40.386 Q11.3 Q11.2 Q11.1
  Top Layer w0.254: Q13.3 61.468,51.308 v1(62.865,49.911) ; R5.2 71.286,43.092 v1(71.882,43.688)
  Top Layer w2.54: P5.1 41.097,40.767 L1.1 42.291,40.894 D1.2
  Bottom Layer w0.254: D1.2 44.018,48.717 61.671,48.717 ; v1(62.865,49.911) 61.671,48.717 ; v1(71.882,43.688) 71.882,46.609 69.774,48.717 61.671,48.717
Computer_Ctrl: MD1.12 Q3.2 | length 22.5
  Top Layer w0.254: MD1.12 44.385,88.646 v1(47.752,88.646) ; v1(48.514,79.375) 51.744,79.375 53.395,77.724 Q3.2
  Bottom Layer w0.254: v1(47.752,88.646) 47.752,82.781 48.514,82.019 v1(48.514,79.375)
Computer_On: P7.3 Q3.1 | length 39.7
  Top Layer w0.254: Q3.1 59.817,78.994 61.849,76.962 61.849,69.342 63.576,67.615 73.53,67.615 77.292,71.377 77.292,74.93 79.745,77.383 P7.3
DTR: Q9.1 R4.2 U?.4 | length 13.2
  Top Layer w0.127: U?.4 40.529,75.148 41.593,74.084 R4.2 48.807,73.143 47.903,72.239 48.26,71.882 48.76,71.882 48.834,71.808 Q9.1
EN: MD1.3 Q9.3 | length 36.4
  Top Layer w0.127: MD1.3 44.385,100.076 v1(46.609,100.076) ; Q9.3 48.834,69.53 v1(49.149,69.215)
  Bottom Layer w0.127: v1(46.609,100.076) 46.609,90.5 46.025,89.916 46.025,71.136 47.946,69.215 v1(49.149,69.215)
ENC_A: MD1.24 P2.1 | length 55.6
  Top Layer w0.127: P2.1 35.814,56.693 35.814,77.364 38.481,80.031 52.822,80.031 53.351,79.502 v1(54.098,79.502) ; v1(58.547,83.058) MD1.24
  Bottom Layer w0.127: v1(54.098,79.502) 54.991,79.502 v1(58.547,83.058)
ENC_B: MD1.26 P2.2 | length 65.9
  Top Layer w0.127: P2.2 35.484,61.363 35.484,77.5 38.344,80.361 62.879,80.361 66.065,83.547 66.065,86.106 66.827,86.868 66.929,86.868 v1(66.929,87.376) ; MD1.26 61.385,87.376 v1(63.246,87.376)
  Bottom Layer w0.127: v1(63.246,87.376) v1(66.929,87.376)
GND: C1.2 C2.2 C3.2 C4.2 J1.A1 J1.A12 MD1.1 MD1.15 MD1.38 MD1.39 P1.2 P1.4 P2.3 P3.2 P3.4 P4.2 P4.4 P5.3 P5.4 pad.2 pad.3 pad.4 pad.5 Q1.3 Q2.3 Q3.3 Q4.3 Q5.3 Q6.3 Q7.3 Q8.3 Q10.3 Q12.3 U1.1 U?.0 | length 1.8
  Top Layer w0.254: MD1.39@49.997,95.169 MD1.39@51.832,95.169
  other v3: 44.831,78.994
IO0: MD1.25 Q9.6 | length 36.9
  Top Layer w0.127: v1(48.768,89.535) 57.023,89.535 59.563,86.995 59.563,86.487 59.891,86.159 MD1.25 ; Q9.6 50.8,71.498 v1(50.8,72.136)
  Bottom Layer w0.127: v1(48.768,89.535) 47.701,89.535 47.066,88.9 47.066,73.152 48.082,72.136 v1(50.8,72.136)
Kont1+: P1.1 Q13.5 Q13.6 Q13.7 Q13.8 | length 21.9
  Top Layer w0.127: Q13.5 Q13.6 Q13.7 Q13.8
  Top Layer w0.254: Q13.5 70.358,50.038 74.796,45.6 P1.1
Kont1_ctrl: MD1.6 Q12.2 | length 51.4
  Top Layer w0.254: MD1.6 44.385,96.266 v1(47.879,96.266) ; v1(53.074,74.41) 53.074,63.763 53.436,63.402 53.436,56.409 53.797,56.048 53.797,52.143 53.997,51.943 Q12.2
  Bottom Layer w0.254: v1(47.879,96.266) 48.334,95.811 48.334,94.651 48.209,94.526 48.209,93.345 53.074,88.48 v1(53.074,74.41)
Kont2+: P1.3 Q11.5 Q11.6 Q11.7 Q11.8 | length 12
  Top Layer w0.127: Q11.5 Q11.6 Q11.7 Q11.8 75.718,33.681 77.637,35.6 P1.3
Kont2_ctrl: MD1.7 Q10.2 | length 64.1
  Top Layer w0.254: MD1.7 44.385,94.996 v1(47.752,94.996) ; v1(52.451,73.66) 52.451,58.862 52.979,58.334 52.979,56.22 53.34,55.858 53.34,49.022 56.007,46.355 62.484,46.355 Q10.2
  Bottom Layer w0.254: v1(47.752,94.996) 47.752,93.091 52.451,88.392 v1(52.451,73.66)
LED1-: P7.2 Q2.2 | length 30.9
  Top Layer w1.778: Q2.2 64.149,74.662 65.927,74.662 68.707,71.882 68.707,70.358 70.231,68.834 73.025,68.834 76.073,71.882 76.073,79.375 78.962,82.264 81.6,82.264 P7.2
LED1_CTRL: MD1.14 Q2.1 | length 26.4
  Top Layer w0.254: MD1.14 46.103,86.159 46.863,86.919 49.149,86.919 49.247,86.821 52.005,86.821 52.688,87.503 v1(55.499,87.503) ; v1(61.468,79.248) 61.468,79.121 62.575,78.014 63.337,78.014 Q2.1
  Bottom Layer w0.254: v1(55.499,87.503) 55.537,87.465 56.045,87.465 59.163,84.347 59.163,81.553 v1(61.468,79.248)
LED2-: P6.2 Q5.2 | length 23.3
  Top Layer w1.778: Q5.2 59.563,63.792 60.086,63.269 60.086,62.975 61.506,61.555 P6.2
LED2_CTRL: MD1.16 Q5.1 | length 27.5
  Top Layer w0.254: v1(48.387,82.931) MD1.16 ; v1(49.403,78.74) 51.689,78.74 54.762,75.667 54.762,64.015 54.966,63.811 Q5.1
  Bottom Layer w0.254: v1(48.387,82.931) 49.403,81.915 v1(49.403,78.74)
LED3-: P6.4 Q8.2 | length 17.8
  Top Layer w1.778: Q8.2 67.832,58.082 67.832,56.12 72.39,51.562 81.712,51.562 P6.4
LED3_CTRL: MD1.13 Q8.1 | length 47
  Top Layer w0.254: MD1.13 44.385,87.376 v1(50.038,87.376) ; v1(50.165,78.105) 53.721,74.549 53.721,63.763 53.893,63.591 53.893,59.743 54.454,59.182 58.928,59.182 60.014,58.096 Q8.1
  Bottom Layer w0.254: v1(50.038,87.376) 50.038,87.323 50.165,87.196 v1(50.165,78.105)
LED+: C4.1 D1.1 L1.2 P6.1 P6.3 P7.1 P8.4 | length 128.6
  Top Layer w2.54: D1.1 49.911,40.894 L1.2 52.364,40.767 C4.1 66.026,32.425 71.019,27.432 83.185,27.432 85.217,29.464 85.217,53.057 ; P6.3 85.217,53.057 ; P6.1 85.217,63.057 ; P7.1 85.217,83.885 ; P8.4 83.065,93.211 85.217,91.059 85.217,83.885 ; 85.217,53.057 85.217,63.057 ; 85.217,63.057 85.217,83.885
NetC2_1: C2.1 R1.2 R2.2 U1.3 | length 11
  Top Layer w0.254: U1.3 43.534,55.98 44.323,56.769 44.323,58.928 45.085,59.69 45.809,59.69 C2.1 45.974,59.779 45.974,58.627 ; R1.2 45.974,58.627 ; R2.2 47.779,57.464 46.615,58.627 45.974,58.627
NetQ9_2: Q9.2 R3.2 | length 4
  Top Layer w0.127: R3.2 48.68,68.922 48.244,69.358 48.244,70.632 48.393,70.782 Q9.2
NetQ9_5: Q9.5 R4.1 | length 4.3
  Top Layer w0.254: Q9.5 50.807,70.855 51.074,70.855 51.816,71.597 51.816,72.39 51.263,72.943 51.263,73.582 R4.1
NetQ10_1: Q10.1 Q11.4 R5.1 | length 13
  Top Layer w0.089: R5.1@69.176,45.085 R5.1
  Top Layer w0.127: Q10.1 67.183,44.831 67.437,45.085 R5.1@69.176,45.085 ; R5.1 69.113,45.046 67.691,43.624 67.691,41.529 68.58,40.64 70.231,40.64 70.485,40.386 Q11.4
NetQ12_1: Q12.1 Q13.4 R6.1 | length 11.2
  Top Layer w0.089: R6.1@54.356,57.238 R6.1 ; Q13.4@60.167,50.094 Q13.4
  Top Layer w0.127: R6.1@54.356,57.238 54.356,55.118 54.864,54.61 Q12.1 56.388,53.213 58.293,51.308 58.293,50.927 59.126,50.094 Q13.4@60.167,50.094
PSU_CTRL: MD1.30 Q6.2 | length 50.8
  Top Layer w0.254: v1(53.987,75.069) 53.987,75.016 54.305,74.697 54.305,63.826 55.575,62.556 58.085,62.556 58.278,62.749 58.278,65.739 56.422,67.595 56.422,70.646 Q6.2 ; v1(58.166,92.456) 61.279,92.456 MD1.30
  Bottom Layer w0.254: v1(53.987,75.069) 53.963,75.069 53.543,75.489 53.543,91.77 54.229,92.456 v1(58.166,92.456)
PSU_ON: P7.4 Q6.1 | length 30.6
  Top Layer w0.254: Q6.1 60.63,72.771 61.392,72.009 61.392,69.153 63.387,67.158 73.719,67.158 78.945,72.383 P7.4
RGB_B: P8.3 Q7.2 | length 28.4
  Top Layer w1.778: Q7.2 71.134,76.214 71.988,76.214 73.137,77.363 73.137,77.404 74.092,78.359 74.092,84.823 78.105,88.837 78.105,97.129 79.147,98.171 81.679,98.171 P8.3
RGB_B_CTRL: MD1.28 Q7.1 | length 18.9
  Top Layer w0.127: MD1.28 61.385,89.916 v1(63.246,89.916) ; v1(67.945,89.535) 67.945,83.439 71.12,80.264 Q7.1
  Bottom Layer w0.127: v1(63.246,89.916) 67.564,89.916 v1(67.945,89.535)
RGB_G: P8.2 Q4.2 | length 20.8
  Top Layer w1.778: Q4.2 70.81,89.549 72.404,89.549 75.692,92.837 75.692,99.695 79.248,103.251 P8.2@81.915,103.251
RGB_G_CTRL: MD1.27 Q4.1 | length 12.1
  Top Layer w0.127: MD1.27 61.385,88.646 v1(63.246,88.646) ; v1(68.707,91.186) 69.596,92.075 Q4.1
  Bottom Layer w0.127: v1(63.246,88.646) 68.199,88.646 68.707,89.154 v1(68.707,91.186)
RGB_R: P8.1 Q1.2 | length 13
  Top Layer w1.778: Q1.2 70.81,103.265 73.674,103.265 78.62,108.211 P8.1
RGB_R_CTRL: MD1.23 Q1.1 | length 26.2
  Top Layer w0.127: MD1.23 57.277,86.995 v1(57.785,87.503)
  Bottom Layer w0.127: v1(57.785,87.503) 61.468,91.186 61.468,96.463 Q1.1
RST: Q9.4 R3.1 U?.6 | length 18.8
  Top Layer w0.127: U?.6 39.529,68.167 v2(39.878,67.818) ; v2(44.958,67.437) 45.847,66.548 47.117,66.548 47.625,66.04 50.292,66.04 50.673,66.421 50.673,67.398 R3.1 50.634,67.539 51.816,68.721 51.816,69.469 51.153,70.132 Q9.4
  Bottom Layer w0.127: v2@39.89,67.818 44.577,67.818 v2(44.958,67.437)
RXD: MD1.34 U?.8 | length 46.1
  Top Layer w0.127: U?.8 41.529,70.648 42.382,71.501 v1(47.371,71.501) ; v1(48.895,90.805) 48.971,90.805 49.657,91.491 55.001,91.491 57.099,93.589 57.099,96.764 57.891,97.557 61.3,97.557 MD1.34
  Bottom Layer w0.127: v1(47.371,71.501) 46.736,71.501 46.355,71.882 46.355,89.779 47.381,90.805 v1(48.895,90.805)
STB+: P5.2 R2.1 | length 30
  Top Layer w0.254: P5.2 40.386,45.056 40.386,50.927 v1(43.18,53.721) ; v1(47.498,54.102) 47.498,54.155 47.879,54.536 R2.1
  Bottom Layer w0.254: v1(43.18,53.721) 47.064,53.721 47.445,54.102 v1(47.498,54.102)
SW1: MD1.31 P4.3 | length 63.6
  Top Layer w0.127: P4.3 36.068,97.946 36.068,84.455 38.481,82.042 62.225,82.042 64.384,84.201 64.384,93.218 63.823,93.779 MD1.31
SW2: MD1.33 P4.1 | length 59.2
  Top Layer w0.127: P4.1 33.713,93.338 35.738,91.313 35.738,84.318 38.344,81.712 62.362,81.712 64.714,84.064 64.714,95.758 64.153,96.319 MD1.33
SW3: MD1.36 P3.3 | length 55.6
  Top Layer w0.127: P3.3 30.722,82.337 37.252,82.337 38.207,81.382 62.499,81.382 65.045,83.927 65.045,99.843 64.758,100.129 MD1.36
SW4: MD1.37 P3.1 | length 63.3
  Top Layer w0.127: P3.1 34.664,72.383 34.823,72.542 34.823,77.774 38.071,81.021 62.605,81.021 65.375,83.791 65.375,84.171 65.405,84.201 65.405,99.949 63.955,101.399 MD1.37
SWE: MD1.29 P2.4 | length 58.5
  Top Layer w0.127: P2.4 35.154,71.033 35.154,77.637 38.207,80.691 62.742,80.691 65.735,83.684 65.735,90.17 66.04,90.475 v1(66.04,91.313) ; MD1.29 61.406,91.313 v1(63.246,91.313)
  Bottom Layer w0.127: v1(63.246,91.313) v1(66.04,91.313)
TXD: MD1.35 U?.9 | length 46.2
  Top Layer w0.127: U?.9 42.529,70.648 42.836,70.955 42.836,71.081 42.926,71.171 44.889,71.171 45.321,70.739 v1(47.371,70.739) ; v1(47.752,90.297) 47.787,90.332 47.787,90.713 48.895,91.821 54.864,91.821 56.769,93.726 56.769,96.901 58.727,98.859 MD1.35
  Bottom Layer w0.127: v1(47.371,70.739) 47.458,70.739 47.7,70.98 47.713,70.98 47.863,71.13 47.863,71.705 46.736,72.831 46.736,89.621 46.98,89.865 47.32,89.865 v1(47.752,90.297)
USB+: J1.A4 R1.1 U?.7 | length 57.4
  Top Layer w0.254: U?.7 40.513,69.882 40.513,68.326 41.275,67.564 43.434,67.564 49.911,61.087 49.911,54.18 49.55,53.819 49.55,53.233 v1(49.53,53.213) ; 44.687,50.927 46.592,52.832 v1(46.609,52.832)
  Top Layer w0.279: J1.A4@44.5,27.25 44.5,35.782
  Top Layer w0.381: 44.5,35.782 44.212,36.069 44.212,38.37 44.687,38.845 44.687,50.927 44.687,53.069 45.847,54.229 45.847,55.849 R1.1
  Bottom Layer w0.254: v1(46.609,52.832) 49.096,52.832 49.477,53.213 v1(49.53,53.213)
USB_D+: J1.A6 U?.1 | length 66.8
  Top Layer w0.127: U?.1 43.529,77.375 42.342,78.562 39.761,78.562 37.249,76.051 37.249,68.786 39.233,66.802 43.172,66.802 49.149,60.825 49.149,54.442 45.847,51.14 45.847,37.973 45.5,37.626 J1.A6@45.5,27.25
USB_D-: J1.A7 U?.2 | length 64.9
  Top Layer w0.127: U?.2 42.545,75.914 42.545,76.983 41.296,78.232 39.897,78.232 37.579,75.914 37.579,68.923 39.37,67.132 43.309,67.132 49.479,60.962 49.479,54.305 46.177,51.003 46.177,37.836 46.5,37.513 J1.A7@46.5,27.25
pads on no net: J1.1 J1.2 J1.3 J1.4 J1.A2 J1.A3 J1.A5 J1.A8 J1.A9 J1.A10 J1.A11 J1.B1 J1.B2 J1.B3 J1.B4 J1.B5 J1.B6 J1.B7 J1.B8 J1.B9 J1.B10 J1.B11 J1.B12 MD1.4 MD1.5 MD1.8 MD1.9 MD1.10 MD1.11 MD1.17 MD1.18 MD1.19 MD1.20 MD1.21 MD1.22 MD1.32 U?.3 U?.5

## Polygon pours and split planes (outlines as drawn)
GND on Bottom Layer "Poly1" (solid, pour order 1): 27.178,121.158 26.416,121.92 22.225,121.92 22.225,9.652 27.559,4.318 28.829,5.588 106.299,5.588 106.299,113.284 92.71,126.873
GND on Top Layer "GND_L01_P000" (solid, pour order 0): 19.05,124.968 19.05,10.668 20.32,9.398 101.219,9.398 101.219,119.38 93.599,127

## Other copper
Top Layer:
  pour cut-out: 43.815,103.886 38.1,109.601 38.1,121.031 66.421,121.031 66.548,121.158 67.564,120.142 67.564,109.474 67.437,109.474 61.849,103.886
Bottom Layer:
  pour cut-out: 38.1,122.301 38.1,109.601 43.815,103.886 61.976,103.886 61.976,104.013 67.564,109.601 67.564,120.269 61.976,120.269 59.944,122.301

## Silkscreen, mask and mechanical layers (free items; w line width, h text height)
Top Overlay:
  text "GND" at 24.638,110.109 h0.76 r270
  text "RGB_R" at 87.503,107.442 h0.76 r90
  text "SW1" at 24.553,104.284 h0.76 r270
  text "RGB_G" at 87.503,101.727 h0.76 r90
  text "GND" at 24.553,99.077 h0.76 r270
  text "RGB_B" at 87.503,97.028 h0.76 r90
  text "SW2" at 24.553,94.124 h0.76 r270
  text "LED+" at 87.63,91.948 h0.76 r90
  text "GND" at 24.553,88.409 h0.76 r270
  text "LED+" at 87.63,86.487 h0.76 r90
  text "SW3" at 24.68,83.202 h0.76 r270
  text "LED1-" at 87.63,81.153 h0.76 r90
  text "GND" at 24.553,77.995 h0.76 r270
  text "COMP" at 87.63,76.2 h0.76 r90
  text "SW4" at 24.553,73.296 h0.76 r270
  text "PSU" at 87.63,71.628 h0.76 r90
  text "SWE" at 24.553,67.835 h0.76 r270
  text "LED+" at 87.63,65.913 h0.76 r90
  text "GND" at 24.553,62.501 h0.76 r270
  text "LED2-" at 87.63,60.198 h0.76 r90
  text "ENC_B" at 24.765,58.42 h0.76 r270
  text "LED+" at 87.63,55.372 h0.76 r90
  text "ENC_A" at 24.638,53.34 h0.76 r270
  text "LED3-" at 87.63,50.419 h0.76 r90
  text "GND" at 24.553,46.372 h0.76 r270
  text "KONT1+" at 87.63,43.942 h0.76 r90
  text "GND" at 24.553,41.165 h0.76 r270
  text "GND" at 87.63,39.624 h0.76 r90
  text "STB+" at 24.638,36.576 h0.76 r270
  text "KONT2+" at 87.63,33.528 h0.76 r90
  text "+12V" at 24.638,31.369 h0.76 r270
  text "GND" at 87.63,29.337 h0.76 r90
Bottom Overlay:
  text "Elias desk LED controller V1.0" at 77.496,115.754 h1.02
  text "Made By: Valtteri Silde" at 77.496,114.093 h1.02
Mechanical 1:
  the board outline again, w0.001

## Text inside footprints (layer, text, board x,y; h text height)
C4: Top Overlay "+" at 61.468,28.321 h1.5 r90